# EAGLE board opaq_n2 (EAGLE 6.3)
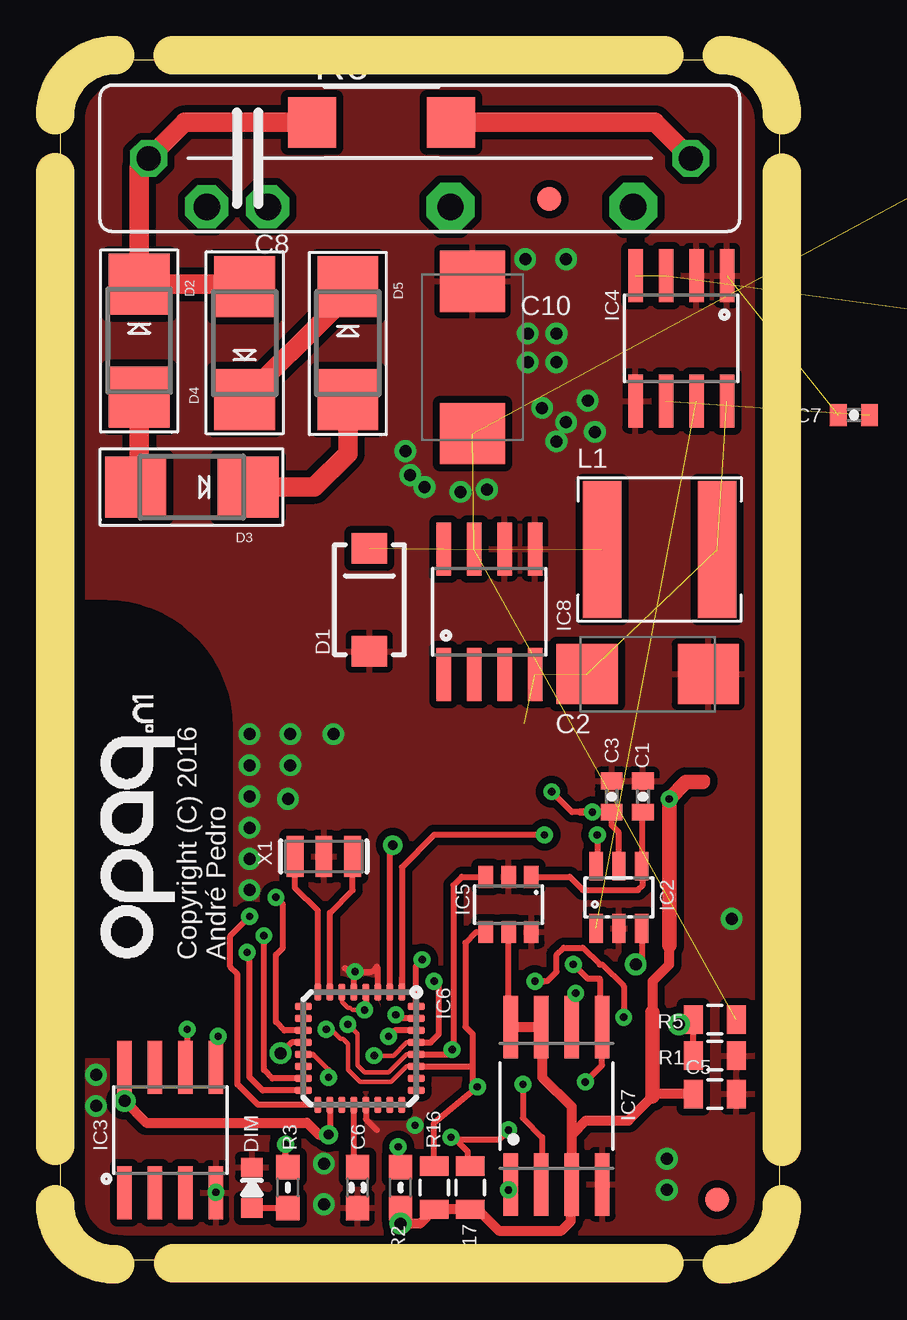
[diagram p0: board, top side]
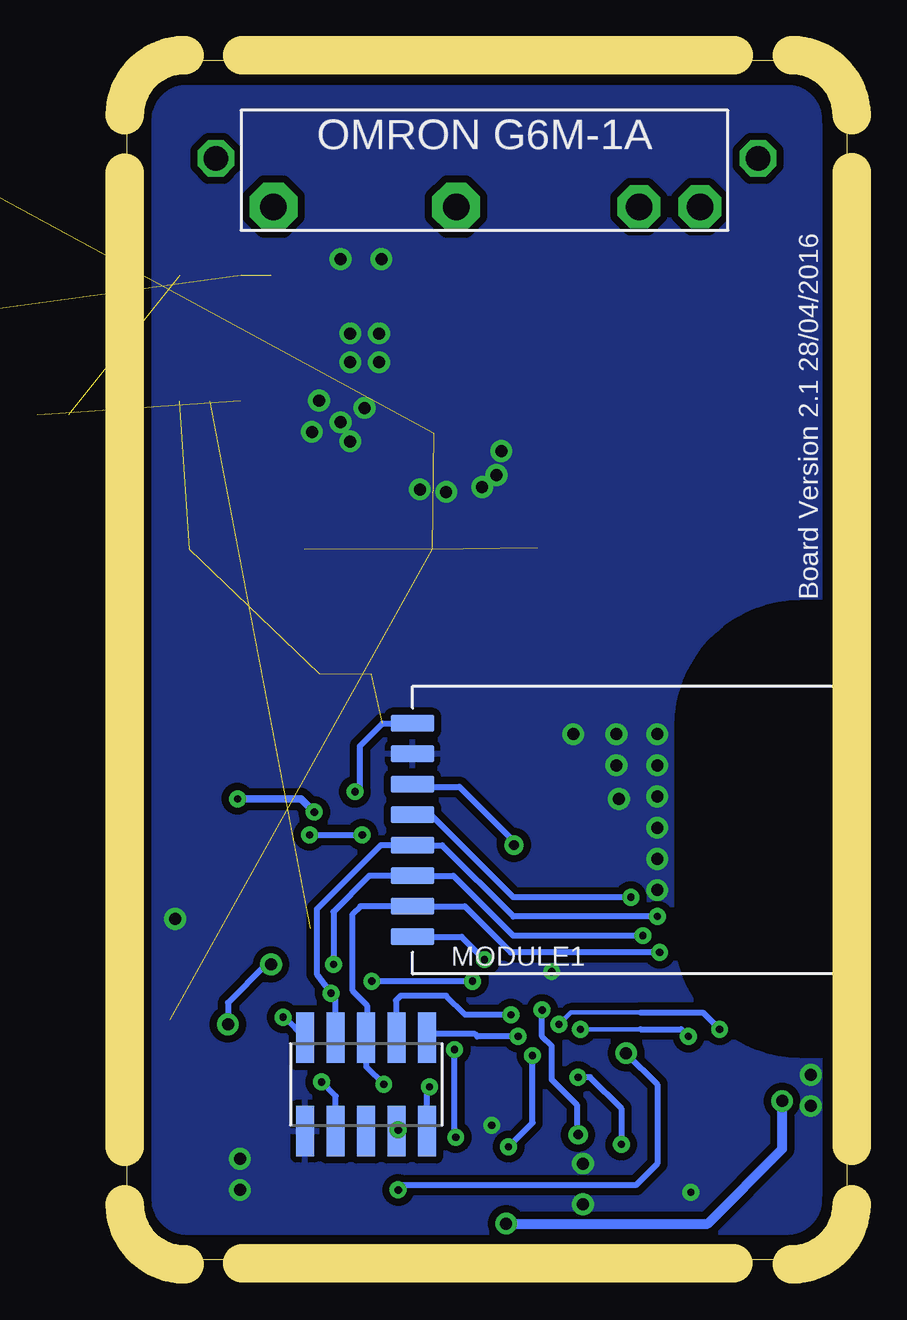
[diagram p1: board, bottom side, seen from below]

Size 30 x 50 mm. Coordinates in mm from the lower left corner, seen from the top.
Outline: 27.5,50 2.5,50 arc90 0,47.5 0,2.5 arc90 2.5,0 27.5,0 arc90 30,2.5 30,47.5 arc90 27.5,50
Copper layers (1*16): Top 0.035mm / dielectric 1.5mm / Bottom 0.035mm
Design rules "default *": minimum track width 10mil, minimum drill 6mil, track to track 7mil, track to pad 7mil, pad to pad 7mil, via to via 7mil, smd to smd 7mil, copper to edge 40mil, drill to drill 8mil, minimum pad ring 10mil, minimum via ring 8mil, stop-mask expansion 4mil, vias tented up to drill 0mil, thermal gap 10mil
Net classes: 1 power: width 0.381 mm, clearance 0.254 mm; 2 gnd: width 0.305 mm, drill 0.406 mm, clearance 0.203 mm; 3 power usb: width 0.508 mm, drill 0.406 mm, clearance 0.203 mm
tRestrict: area 0,8.7 to 6.9,27.2
bRestrict: area 0,8.7 to 6.9,27.2
Milling: 8 lines

## Footprints (pad centres in the part's own frame; a part is rotated, then mirrored left to right if it is on the bottom)
0402-CAP = smd 0.7 x 0.9: 1 -0.65,0; 2 0.65,0
C/6032-28R = smd 2.55 x 2.5: + 2.525,0; - -2.525,0
0805 = smd 0.8 x 1.2: 1 -0.9,0; 2 0.9,0
0603-CAP = smd 1.016 x 0.965: 1 -0.85,0; 2 0.85,0
C225-062X268 = drill 1.016 octagon: 1 -11.303,0; 2 11.303,0
D/7343-31R = smd 2.55 x 2.7: + 3.175,0; - -3.175,0
SMA-DIODE = smd 1.27 x 1.47: A -2.15,0; C 2.15,0
SMADIODE = smd 2.54 x 2.54: A 2.349,0; C -2.349,0
0603-LED = smd 0.8 x 0.9: MINUS -0.85,0; PLUS 0.85,0
5-2,5 = smd 2.54 x 5.08: 1 0,0
SOT23-6 = smd 0.55 x 1.2: 1 -0.95,-1.3; 2 0,-1.3; 3 0.95,-1.3; 4 0.95,1.3; 5 0,1.3; 6 -0.95,1.3
SOIC8 = smd 0.61 x 2.21: 1 -1.905,-2.616; 2 -0.635,-2.616; 3 0.635,-2.616; 4 1.905,-2.616; 5 1.905,2.616; 6 0.635,2.616; 7 -0.635,2.616; 8 -1.905,2.616
SO08 = smd 0.61 x 2.21: 1 -1.905,-2.616; 2 -0.635,-2.616; 3 0.635,-2.616; 4 1.905,-2.616; 5 1.905,2.616; 6 0.635,2.616; 7 -0.635,2.616; 8 -1.905,2.616
SOT23-6' = smd 0.6 x 0.9: 1 -0.95,-1.15; 2 0,-1.15; 3 0.95,-1.15; 4 0.95,1.15; 5 0,1.15; 6 -0.95,1.15
MLF32 = smd 0.7 x 0.3: 1 -2.35,1.75; 2 -2.35,1.25; 3 -2.35,0.75; 4 -2.35,0.25; 5 -2.35,-0.25; 6 -2.35,-0.75; 7 -2.35,-1.25; 8 -2.35,-1.75; 17 2.35,-1.75; 18 2.35,-1.25; 19 2.35,-0.75; 20 2.35,-0.25; 21 2.35,0.25; 22 2.35,0.75; 23 2.35,1.25; 24 2.35,1.75 | smd 0.3 x 0.7: 9 -1.75,-2.35; 10 -1.25,-2.35; 11 -0.75,-2.35; 12 -0.25,-2.35; 13 0.25,-2.35; 14 0.75,-2.35; 15 1.25,-2.35; 16 1.75,-2.35; 25 1.75,2.35; 26 1.25,2.35; 27 0.75,2.35; 28 0.25,2.35; 29 -0.25,2.35; 30 -0.75,2.35; 31 -1.25,2.35; 32 -1.75,2.35
SO08WIDE = smd 0.61 x 2.6: 1 -1.905,-3.269; 2 -0.635,-3.269; 3 0.635,-3.269; 4 1.905,-3.269; 5 1.905,3.286; 6 0.635,3.286; 7 -0.635,3.286; 8 -1.905,3.286
FIDUCIAL-1X2.5 = smd 1 x 1: 1 0,0
62101021021 = smd 0.75 x 2.1: 1 -1.905,-1.95; 2 -0.635,-1.95; 3 0.635,-1.95; 4 1.905,-1.95; 5 3.175,-1.95; 6 3.175,1.95; 7 1.905,1.95; 8 0.635,1.95; 9 -0.635,1.95; 10 -1.905,1.95
2525 = smd 1.6 x 5.7: P$1 2.4,0; P$2 -2.4,0
SMD8-MODULE = smd 0.7 x 1.8: 1 -4.445,0; 2 -3.175,0; 3 -1.905,0; 4 -0.635,0; 5 0.635,0; 6 1.905,0; 7 3.175,0; 8 4.445,0
0603-RES = smd 1.016 x 0.965: 1 -0.85,0; 2 0.85,0
R2512W = smd 2 x 2.1: 1 -2.896,0; 2 2.896,0
OMRON_G6M-1A = drill 1.1 pad 1.8 octagon: COIL1 -1.52,-6.44; COIL2 -1.52,-8.98 | drill 1.1 pad 2 octagon: NO1 -1.52,8.8; NO2 -1.52,1.18
RESONATOR-SMD = smd 0.7 x 1.7: 1 -1.2,0; 2 0,0; 3 1.2,0

## Placement (x,y rotation side)
C1  100pf  [0402-CAP]  24.3,19.3 90 top
C2  [C/6032-28R]  24.5,24.4 180 top
C3  100pf  [0402-CAP]  23,19.3 90 top
C5  0.1uF  [0805]  27.3,6.9 0 top
C6  0.1  [0603-CAP]  12.4,3 270 top
C7  100pf  [0402-CAP]  33.1,35.2 180 top
C8  [C225-062X268]  15,45.9 0 top
C10  [D/7343-31R]  17.2,37.6 270 top
D1  SS36  [SMA-DIODE]  12.9,27.5 90 top
D2  [SMADIODE]  3.3,38.3 270 top
D3  [SMADIODE]  5.5,32.2 180 top
D4  [SMADIODE]  7.7,38.2 90 top
D5  [SMADIODE]  12,38.2 270 top
DIM  LED0603  [0603-LED]  8,3 270 top
FRAME1  FRAME-LETTER  [CREATIVE_COMMONS]  -19.51,-10.12 0 top  (outside the outline)
FRAME2  FRAME-LETTERNO_PACKAGE  [DUMMY]  -19.51,-10.12 0 top  (outside the outline)
GND  WIREPADSMD5-2,5  [5-2,5]  51.7,37.4 0 bottom  (outside the outline)
IC2  TS5A3157  [SOT23-6]  23.3,15.1 0 top
IC3  ATSHA204_SOIC8  [SOIC8]  4.6,5.4 0 top
IC4  ACS712  [SO08]  25.9,38.4 180 top
IC5  ADS1100  [SOT23-6']  18.7,14.8 180 top
IC6  ATMega-328  [MLF32]  12.5,8.8 270 top
IC7  AT25F512BWIDE_5.3MM  [SO08WIDE]  20.7,6.4 0 top
IC8  LM2594HV  [SO08]  17.9,27 0 top
JP1  FIDUCIAL1X2.5  [FIDUCIAL-1X2.5]  27.4,2.5 0 top
JP2  FIDUCIAL1X2.5  [FIDUCIAL-1X2.5]  20.4,44.2 0 top
K1  62101021021  [62101021021]  19.4,7.3 180 bottom
L1  [2525]  25,29.6 0 top
MODULE1  NRF24L01-MOD-SMD  [SMD8-MODULE]  18.1,17.9 270 bottom
R1  [0805]  27.3,8.5 180 top
R2  10k  [0603-RES]  14.2,3 90 top
R3  1k5  [0603-RES]  9.5,3 90 top
R5  [0805]  27.3,10 180 top
R6  [R2512W]  13.4,47.4 0 top
R16  100k  [0805]  15.6,3 270 top
R17  [0805]  17.1,3 270 top
U$1  OMRON_G6M-1A  [OMRON_G6M-1A]  15.1,45.4 90 bottom
VPLUS_IN  WIREPADSMD5-2,5  [5-2,5]  58,37.6 0 bottom  (outside the outline)
VPLUS_OUT  WIREPADSMD5-2,5  [5-2,5]  38,45.7 0 bottom  (outside the outline)
X1  16 MHz  [RESONATOR-SMD]  11,16.8 180 top

## Library data of the parts
C1 C3 C5 C7 R16 = SparkFun-Passives
C2 C10 = rcl
C6 DIM IC6 IC7 R2 R3 = LowPowerLab
C8 R1 R5 R6 R17 = resistor
D1 IC4 JP1 JP2 X1 = SparkFun
D2-D5 = adafruit
FRAME1 = SparkFun-Aesthetics
FRAME2 = SparkFun-Aesthetics; DESIGNER: Nobody; VERSION: v01
GND VPLUS_IN VPLUS_OUT = wirepad
IC2 = pimoroni
IC3 = SparkFun-DigitalIC; PROD_ID: IC-11981
IC5 = bytewerk-analog; MF: TI; MPN: ADS1100; OC_MOUSER: 595-ADS1100A1IDBVT
IC8 L1 = apedro_lib
K1 = Wurth_Elektronik_Electromechanic_Board_to_Board_Connectors_rev15c
MODULE1 = nrf24l01
U$1 = captain-slow

## Nets
3.3V: C2.+ C3.1 C5.1 IC2.5 IC3.8 IC4.8 IC5.5 IC6.4 IC6.6 IC6.18 IC7.3 IC7.7 IC7.8 IC8.4 L1.P$1 MODULE1.1 R2.1 R16.2 R17.2
A0: IC6.23
A1: IC6.24
A2: IC6.25
A3: IC6.26
A4_SDA: IC3.5 IC5.4 IC6.27 K1.10 R16.1
A5_SCL: IC3.6 IC5.3 IC6.28 K1.9 R17.1
A6: IC6.19
A7: IC6.22
ADC_IN: C1.1 IC2.4 IC5.1
AREF: C6.1 IC6.20
CTRL_ADC: IC2.6 IC6.1
CURRENT_VOUT: IC2.1 IC4.7
D0_RX: IC6.30 K1.1
D1_TX: IC6.31 K1.2
D8: IC6.12 IC7.1
D11_MOSI: IC6.15 IC7.5 K1.7 MODULE1.6
D12_MISO: IC6.16 IC7.2 K1.3 MODULE1.7
D13_SCK: IC6.17 IC7.6 K1.4 MODULE1.5
DIM1: IC6.9
DIM2: IC6.10
DIM3: IC6.13 R3.2
DIM4: IC6.14
FILT: C7.1 IC4.6
GND: C1.2 C2.- C3.2 C5.2 C6.2 C7.2 C10.- D1.A DIM.MINUS IC2.2 IC3.4 IC4.1 IC4.2 IC4.5 IC5.2 IC5.6 IC6.3 IC6.5 IC6.21 IC7.4 IC8.5 IC8.6 K1.6 MODULE1.2 R1.1 X1.2
GND_IN: GND.1 IC4.3 IC4.4
L: C8.2 R6.2
LC: C8.1 D2.C D4.A R6.1
N: D3.C D5.A
N$1: IC6.7 X1.1
N$2: DIM.PLUS R3.1
N$17: D1.C IC8.8 L1.P$2
N$21: IC6.8 X1.3
NRF24_CE: IC6.2 MODULE1.3
NRF24_CSN: IC6.11 MODULE1.4
NRF24_IRQ: IC6.32 MODULE1.8
RST: IC6.29 K1.5 R2.2
V+: D4.C D5.C
V-: D2.A D3.A
V_MEASURE: IC2.3 R1.2 R5.2
VCC: K1.8
VPLUS_IN [power]: C10.+ IC8.7 R5.1 VPLUS_IN.1 VPLUS_OUT.1

## Tracks (layer width: path | path; a pad name or v marks a point on that pad's centre or on a via)
3.3V  (via drill 0.3, 0.4, 0.5)  (4 unrouted)
  Top 0.178: v12.7,10.4 12.2,10.4 12.1,10.5 12,10.5 11.75,10.75 IC6.6
  Top 0.254: IC6.18 11.25,5.25 v11.2,5.2 | IC6.4 12.75,10.35 v12.7,10.4 | 18.8,13.75 IC5.5 18.7,9.78 IC7.8 | IC3.8 v2.69,6.61 | R17.2 17.4,2.1 | 21.3,3.1 IC7.3 | v14.2,1.5 R2.1 | IC2.5 23.3,17.8 23,18.1 C3.1 v22.2,18.65 | 21.7,18.65 21.35,18.65 v20.5,19.5
  Top 0.305: v22.2,18.65 21.7,18.65
  Top 0.406: 26.8,19.9 26.9,20 | 25.5,13.2 25.4,13.1 25.4,12.3 24.7,11.6 24.7,10.3 | v2.69,6.61 3.6,5.7 10.3,5.7 10.8,5.2 v11.2,5.2 | IC7.8 IC7.7 20.1,9.65 20.1,7.6 21.34,6.37 21.34,5.2 | R17.2 R16.2 15,1.5 v14.2,1.5 | 17.4,2.1 18.3,1.2 20.9,1.2 21.3,1.6 21.3,3.1 | IC7.3 21.34,5.2 | 21.34,5.2 21.93,5.8 23.7,5.8 24.7,6.8 24.7,6.9 C5.1
  Top 0.61: 26.8,19.9 26.1,19.9 v25.4,19.2 25.4,13.1 | 24.7,10.3 24.7,6.8
  Bottom 0.254: v12.7,10.4 12.7,9.3 12.3,8.9 12.3,7.5 IC6.18 11.25,5.25 v11.2,5.2 | v20.5,19.5 20.3,19.7 20.3,21.4 19.36,22.34 MODULE1.1
  Bottom 0.305: v25.4,19.2 22.75,19.2 v22.2,18.65
  Bottom 0.406: v14.2,1.5 5.8,1.5 2.69,4.61 v2.69,6.61
A4_SDA  (via drill 0.3)
  Top 0.178: IC6.27 14.45,8.05 13.8,7.4 12.5,7.4 12,7.9 12,9 11.8,9.2 11.7,9.2 11.3,9.6 v11.1,9.6
  Top 0.254: IC5.4 17.35,13.65 16.9,13.2 16.9,9.7 17.2,9.4 17.2,8 | IC6.27 17.15,8.05 17.2,8 | v6.6,9.3 6.6,8.11 IC3.5 | R16.1 15.6,5.7 v17.4,7.2 17.2,7.4 17.2,8
  Bottom 0.178: 8.6,9.6 v11.1,9.6
  Bottom 0.254: 8.6,9.6 6.9,9.6 v6.6,9.3 | K1.10 17.5,7.11 v17.4,7.2
A5_SCL  (via drill 0.3)
  Top 0.178: IC6.28 14.45,8.55 13.7,7.8 12.7,7.8 12.4,8.1 12.4,9.4 v12,9.8
  Top 0.254: IC5.3 16.75,15.95 16.4,15.6 16.4,8.8 v16.35,8.75 16.15,8.55 IC6.28 | v5.3,9.6 5.3,8.08 IC3.6 | R17.1 17,4 17,4.5 16.4,5.1 v16.3,5.1 16.4,5 18.3,5 v18.7,5.4
  Bottom 0.178: 8.6,10.3 11.5,10.3 v12,9.8
  Bottom 0.254: 8.6,10.3 6,10.3 v5.3,9.6 | v16.3,5.1 16.35,5.15 v16.35,8.75 | K1.9 v18.7,5.4
ADC_IN
  Top 0.254: IC5.1 21.25,15.95 21.8,15.4 24.1,15.4 24.3,15.6 24.3,16.35 IC2.4 24.25,18.6 C1.1
AREF
  Top 0.254: C6.1 12.25,4 IC6.20
CTRL_ADC  (via drill 0.3)
  Top 0.254: v22.4,17.7 22.4,16.45 IC2.6 | 14.25,11.75 IC6.1 14.25,16.35 15.6,17.7 v20.2,17.7
  Bottom 0.254: v22.4,17.7 v20.2,17.7
CURRENT_VOUT  (1 unrouted)
D0_RX  (via drill 0.3)
  Top 0.254: IC6.30 13.95,9.55 v13.7,9.3
  Bottom 0.254: v13.7,9.3 15.4,9.3 15.5,9.4 17.34,9.4 K1.1
D1_TX  (via drill 0.3)
  Top 0.254: IC6.31 14.05,10.05 v14,10.2
  Bottom 0.254: v14,10.2 15.9,10.2 16.7,11 18.6,11 18.8,10.8 18.8,9.29 K1.2
D8  (via drill 0.3, 0.5)
  Top 0.254: IC6.12 9.65,9.05 v9.2,8.6 | v18.7,2.9 18.76,3.1 IC7.1
  Bottom 0.254: v9.2,8.6 7.9,7.3 7.9,4 8.8,3.1 18.5,3.1 v18.7,2.9
D11_MOSI  (via drill 0.3)
  Top 0.254: IC6.15 8.85,7.55 8.5,7.9 v8.5,13.5 | v21.9,7.4 22.6,8.1 IC7.5 22.5,9.79 22.5,11.7 22,11.7 v21.4,12.3
  Bottom 0.254: v8.5,13.5 13.9,13.5 16.39,15.99 MODULE1.6 19.91,15.99 21.4,14.5 v21.4,12.3 | K1.7 21.3,6.8 v21.9,7.4
D12_MISO  (via drill 0.3)
  Top 0.254: IC6.16 8.45,7.05 7.9,7.6 7.9,12.7 v7.8,12.8 | v19.3,7.3 19.3,5.9 20.1,5.1 20.1,3.17 IC7.2
  Bottom 0.254: v7.8,12.8 14,12.8 15.93,14.72 MODULE1.7 20.27,14.72 20.6,14.4 20.6,11.2 20,10.6 20,9.29 K1.3 20.04,8.04 v19.3,7.3
D13_SCK  (via drill 0.3)
  Top 0.254: IC6.17 8.25,6.45 7.4,7.3 7.4,11.9 7.1,12.2 7.1,13.5 v7.9,14.3 | IC7.6 21.5,9.85 v21.5,11.1
  Bottom 0.254: v7.9,14.3 13.9,14.3 16.86,17.27 MODULE1.5 19.43,17.27 22.1,14.6 22.1,11.9 v21.5,11.1 21.3,11.11 K1.4
DIM3  (via drill 0.3)
  Top 0.178: 10.55,8.55 11.2,7.9
  Top 0.254: R3.2 9.5,4.1 9.4,4.2 v9.4,4.8 | IC6.13 10.55,8.55 | 11.2,7.9 v11.2,7.6
  Bottom 0.254: v11.2,7.6 10.7,7.6 9.4,6.3 v9.4,4.8
FILT  (1 unrouted)
GND  (via drill 0.3, 0.5)  (1 unrouted)
  Top 0.254: IC6.21 12.75,5.85 13.2,5.4 | IC6.5 12.25,11.78 11.88,12.15 | IC6.3 13.25,12.15 13.2,12.2 13,12 v12.3,12
  other vias: 14.4,33.7 19.4,41.7 21.1,41.7 6.5,2.8 7.9,16.7 28,14.2 9.5,19.2 9.6,20.6 17.8,32.1 9.6,21.9 11.4,21.9 25.3,2.9 25.3,4.2 20.7,34.1 14.6,32.7 16.7,32 11,2.3 1.5,6.4 11,4 1.5,7.7 22,35.8 20.1,35.5 22.3,34.5 21.1,34.9 15.2,32.2 19.5,38.6 19.5,37.4 20.7,38.6 20.7,37.4 14.8,5.6 7.9,18 7.9,19.3 7.9,20.6 7.9,21.9 7.9,15.4
  pour Top (isolate 0.305): 0,50 30,50 30,0 0,0
  pour Bottom (isolate 0.305): 0,50 30,50 30,0 0,0
GND_IN  (2 unrouted)
L
  Top 0.813: R6.2 24.8,47.4 C8.2
LC
  Top 0.813: R6.1 5.2,47.4 C8.1 3.3,45.5 D2.C 7.6,40.65 D4.A
N
  Top 0.813: D3.C 10.6,32.2 12,33.6 D5.A
N$1
  Top 0.254: IC6.7 11.25,14.45 12.2,15.4 X1.1
N$2
  Top 0.254: DIM.PLUS R3.1
N$17  (2 unrouted)
N$21
  Top 0.254: IC6.8 10.75,14.55 9.8,15.5 X1.3
NRF24_CE  (via drill 0.4)
  Top 0.254: 13.88,17.23 v13.88,17.27 13.75,17.15 IC6.2
  Bottom 0.254: MODULE1.3 18.4,19.7 16.15,19.7 13.88,17.43 v13.88,17.27
NRF24_CSN  (via drill 0.3)
  Top 0.254: IC6.11 9.35,9.55 9,9.9 9,12.7 9.3,13 9.3,14.8 v9,15.1
  Bottom 0.254: MODULE1.4 17.34,18.54 13.9,15.1 v9,15.1
NRF24_IRQ  (via drill 0.3)
  Top 0.254: IC6.32 14.85,12.25 v15.1,12.5
  Bottom 0.254: MODULE1.8 16.05,13.46 v15.1,12.5
RST  (via drill 0.3)
  Top 0.178: IC6.29 14.45,9.05 13.9,8.5 v13.1,8.5
  Top 0.254: R2.2 14.1,3.95 v14.1,4.7 | IC6.29 15.45,9.05 15.8,9.4 15.8,11.4 v15.6,11.6 | 20.2,11.6 v19.8,11.6 20.3,11.6 20.7,12 20.7,12.7 21,13 21.8,13 22.5,12.3 22.6,12.3 23.5,11.4 v23.5,10.1
  Bottom 0.254: 13.15,8.55 v13.1,8.5 13.1,5.7 v14.1,4.7 | v15.6,11.6 v19.8,11.6 | v23.5,10.1 23.43,10.1 K1.5
V+
  Top 0.813: D4.C 7.7,35.9 11.4,39.6 11.4,39.95 D5.C
V-
  Top 0.813: D2.A 3.3,32.35 D3.A
V_MEASURE  (via drill 0.5)
  Top 0.254: v25.8,9.8 26.2,9.8 26.3,9.9 26.4,9.9 R5.2 R1.2 | IC2.3 24.25,12.55 v24,12.3
  Bottom 0.254: v25.8,9.8 25.8,10.7 24.2,12.3 v24,12.3
VPLUS_IN  (4 unrouted)

## Text on the board
tPlace: Copyright (C) 2016 / André Pedro
bNames: Board Version 2.1 28/04/2016
tDocu: André Pedro